# Altium PCB m10motor.PcbDoc
Units mil, origin at the board's own origin, x right, y up, seen from the top; angles counter-clockwise.
Board outline 2000 x 2600 mil, 2 copper layers (Top Layer, Bottom Layer); 22 components, 53 nets, 113 pads, 18 vias.
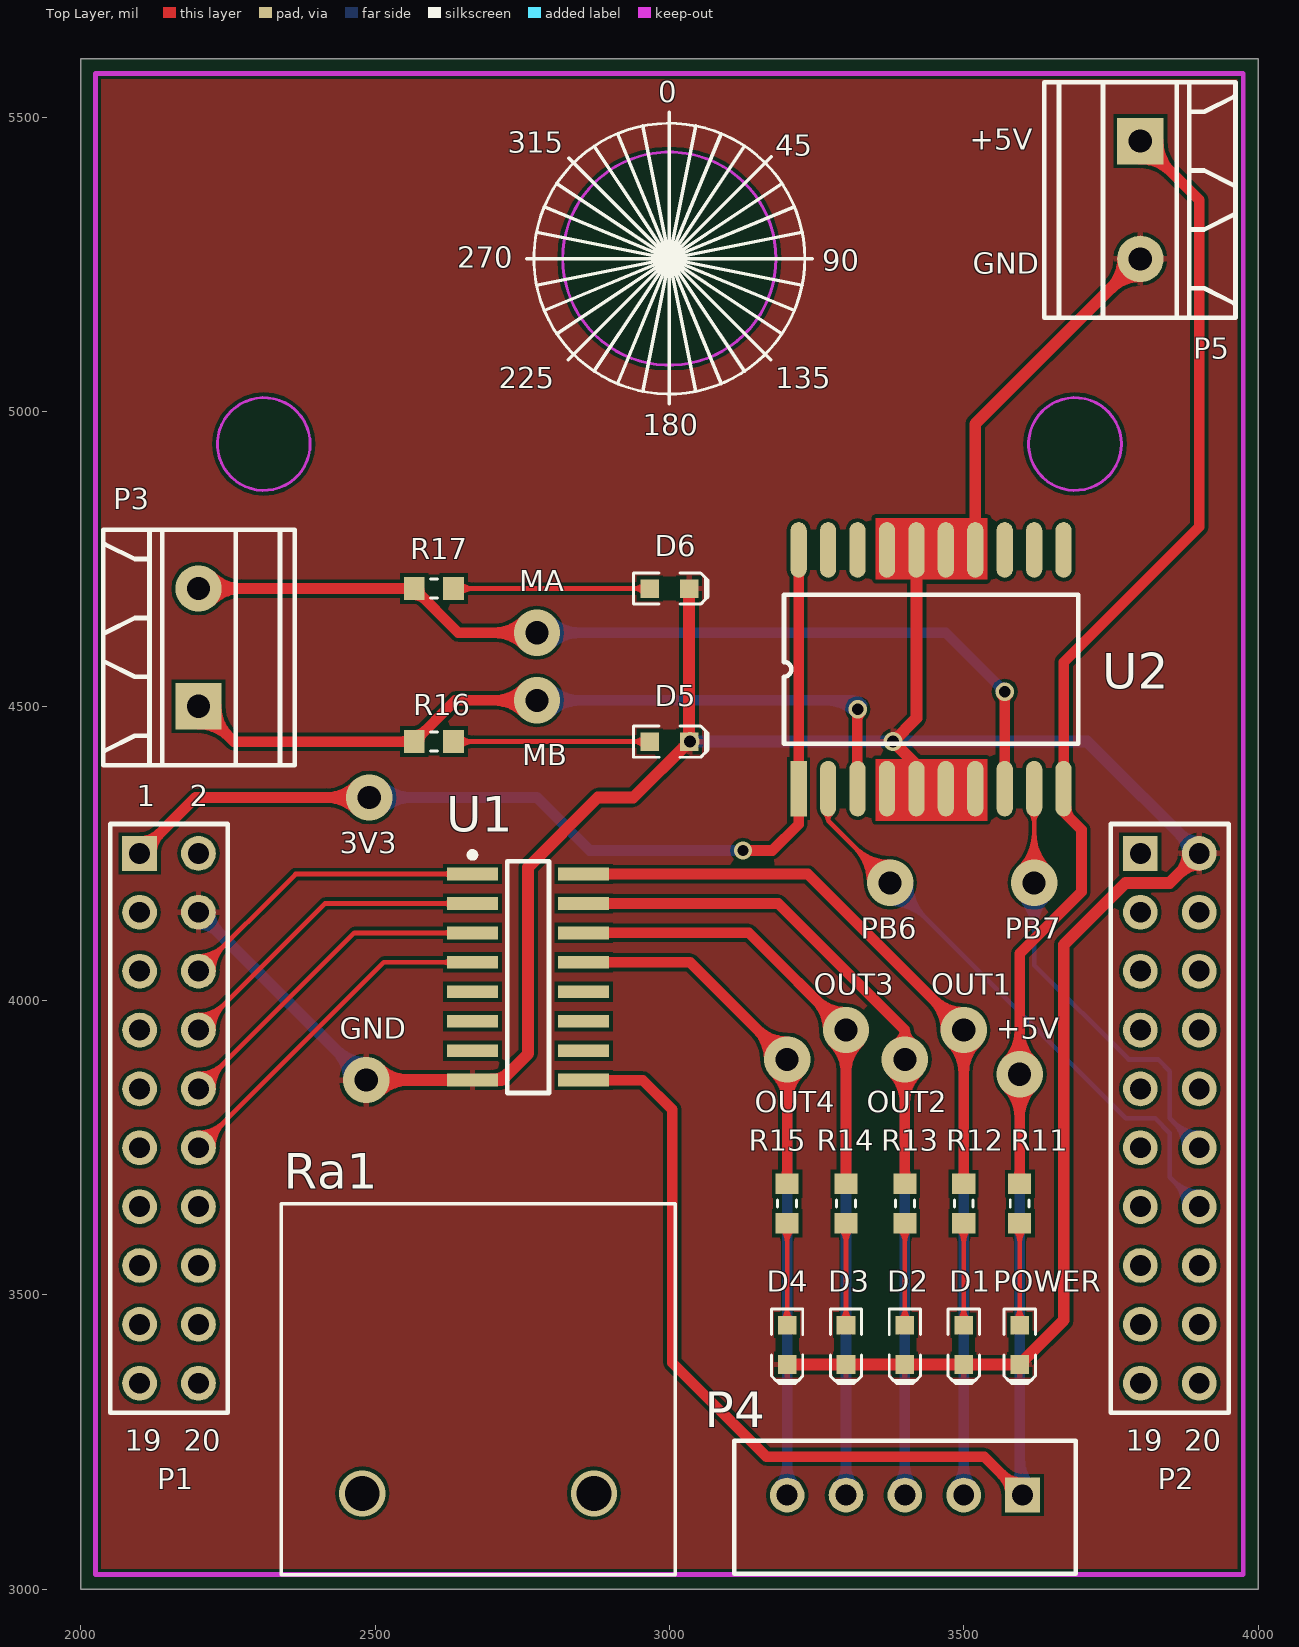
[diagram p0: Top Layer view]
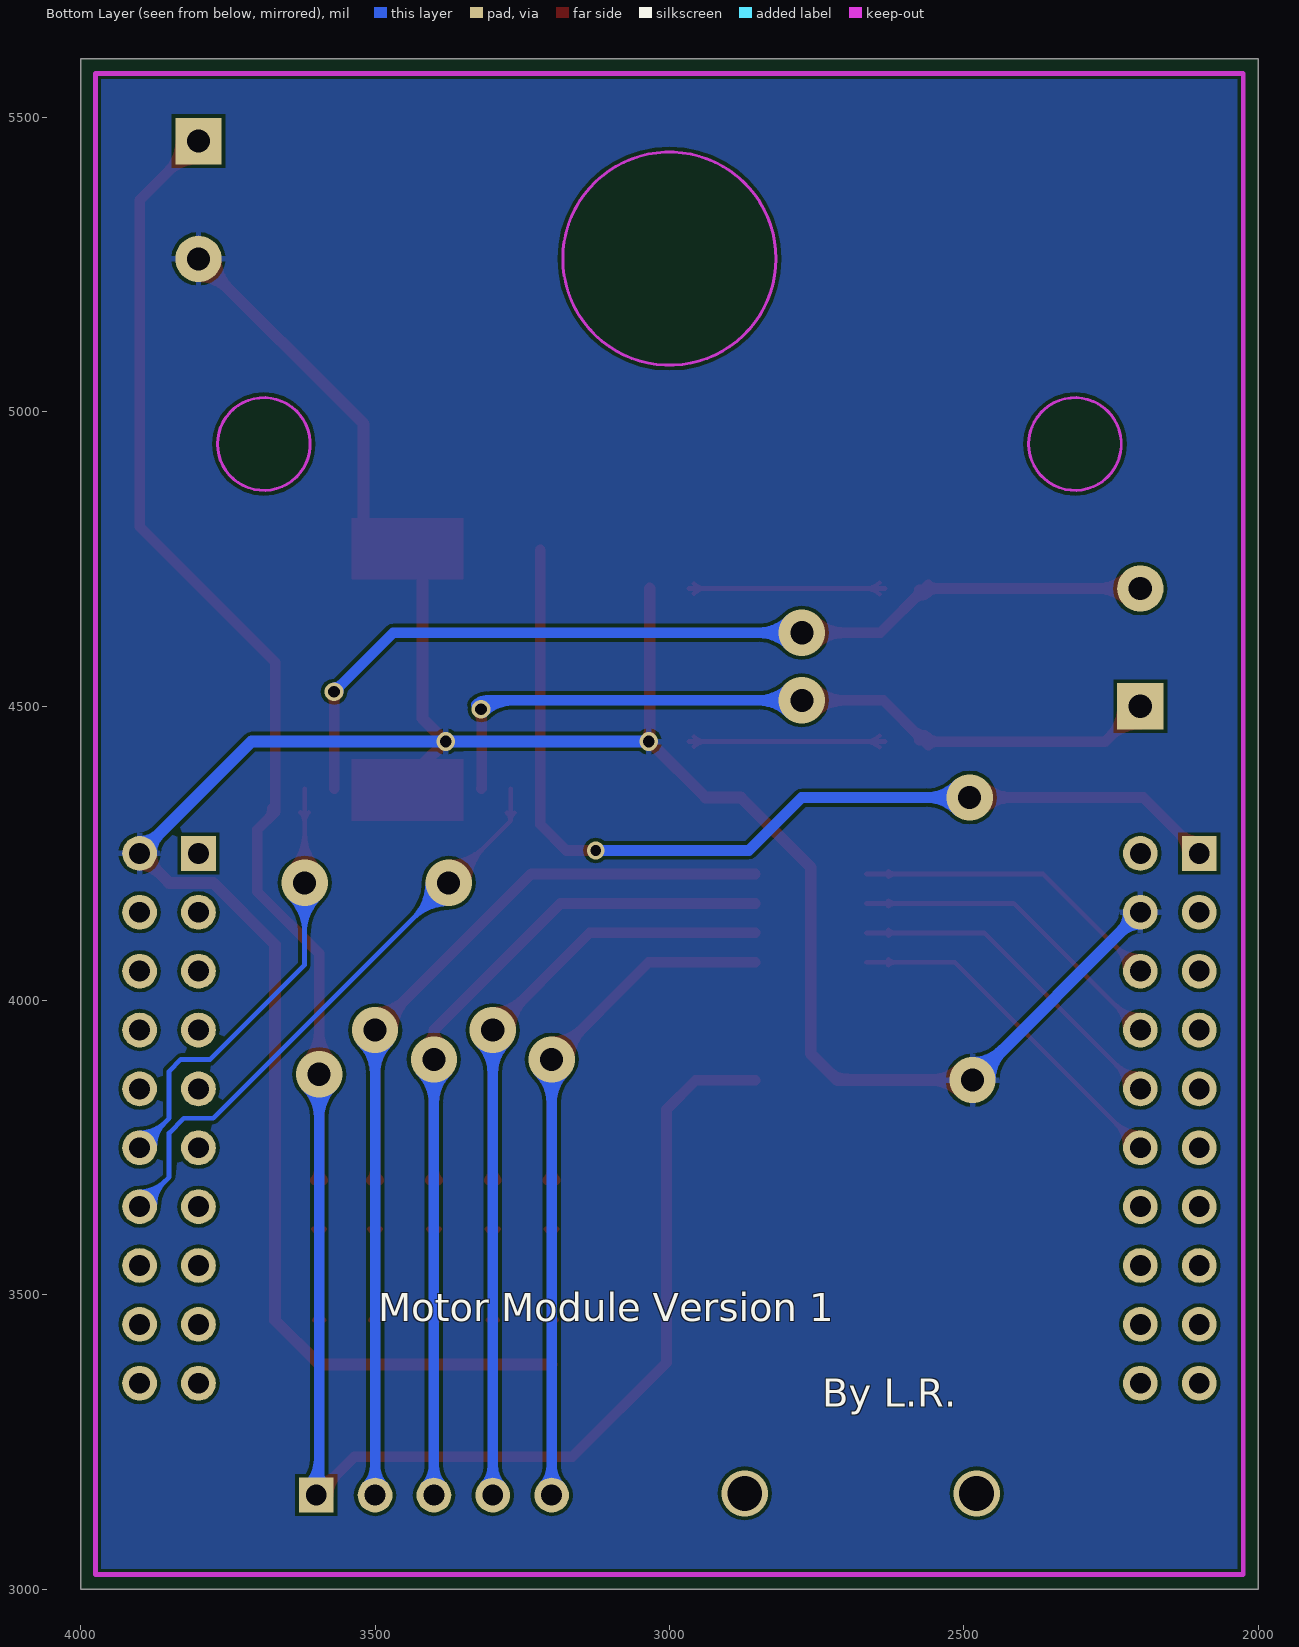
[diagram p1: Bottom Layer view, seen from below]
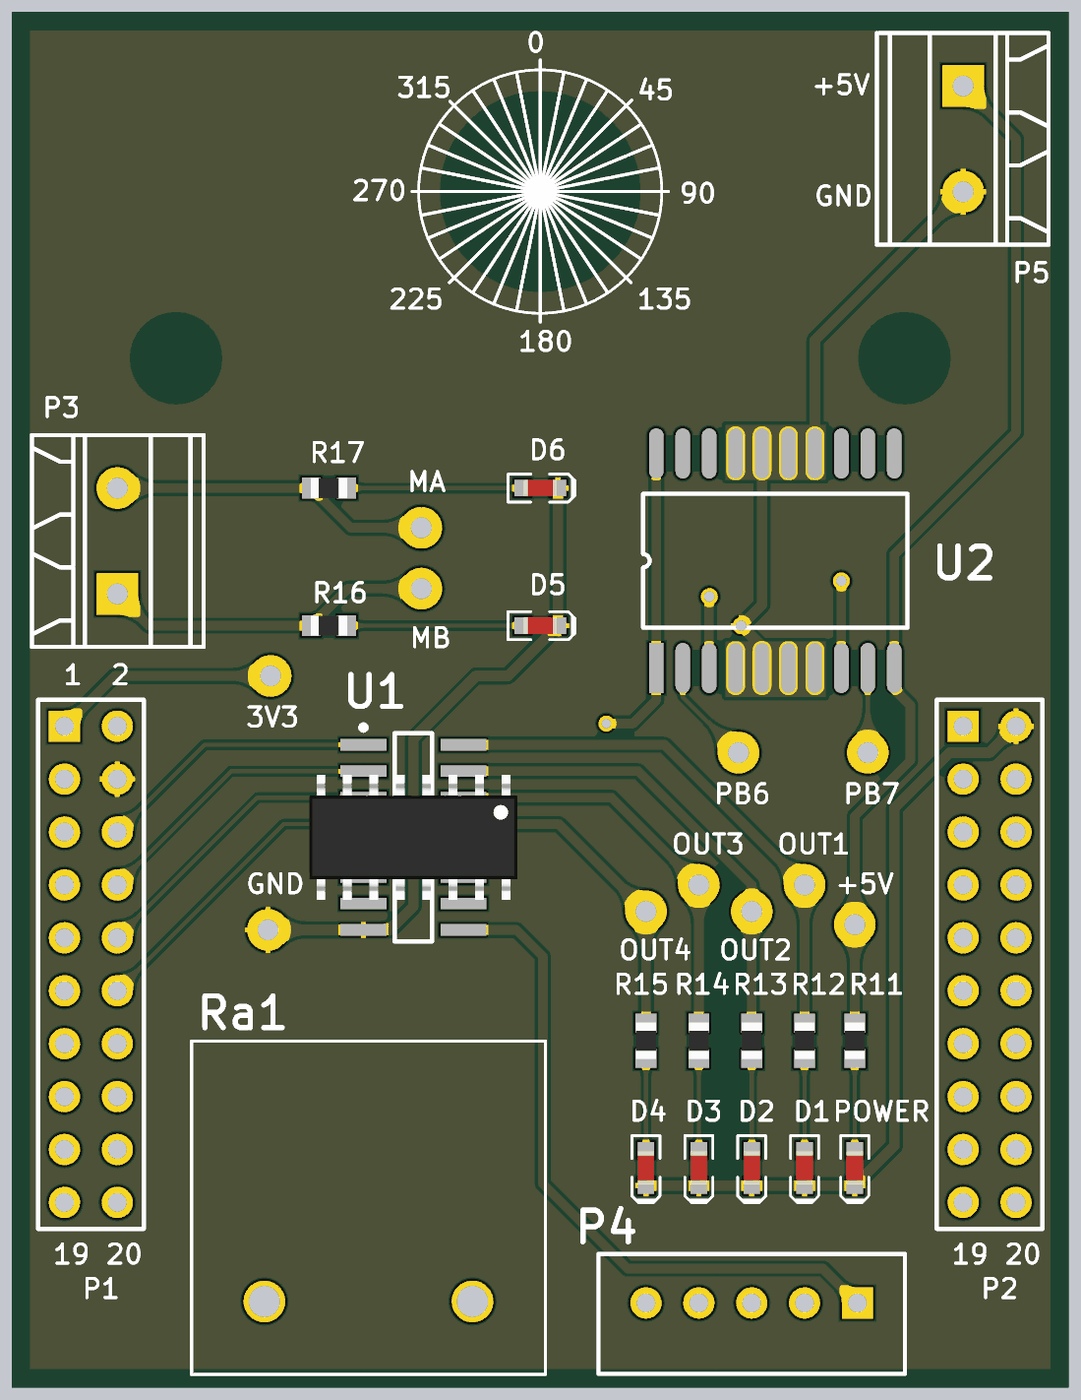
[diagram p2: 3D render of the assembled board from above, using the file's embedded part models]

## Layer stack, top to bottom
Top Layer: signal copper 1.4
Dielectric: dielectric 12.6, FR-4, Dk 4.8
Bottom Layer: signal copper 1.4

## Board outline
2000,3000 4000,3000 4000,5600 2000,5600

## Design rules (kind name [scope] priority, off if disabled: settings)
Clearance [All] p1: gap=6
PolygonConnect [All] p1: connectstyle=Relief reliefconductorwidth=10 reliefentries=4 polygonreliefangle="90 Angle"
RoutingVias VSS [InNet('GND')] p1: holewidth=20 width=32 viastyle="Through Hole" minholewidth=20 minwidth=32 maxholewidth=40 maxwidth=80
RoutingVias 5V [(InNet('MA') OR InNet('MB') OR InNet('O1') OR InNet('O2') OR InNet('O3') OR InNet('O4') OR InNet('VCC') OR InNet('VCC3.3'))] p2: holewidth=18 width=30 viastyle="Through Hole" minholewidth=18 minwidth=30 maxholewidth=40 maxwidth=80
RoutingVias [All] p3: holewidth=12 width=24 viastyle="Through Hole" minholewidth=12 minwidth=24 maxholewidth=40 maxwidth=80
SilkscreenOverComponentPads [All] p1: minsilkscreentomaskgap=10
SolderMaskExpansion [All] p1: expansion=4
Width GND [InNet('GND')] p1: maxlimit=20 minlimit=20 preferedwidth=20 minimp=50.000000 maximp=50.000000 favimp=50.000000
Width VCC [(InNet('MA') OR InNet('MB') OR InNet('O1') OR InNet('O2') OR InNet('O3') OR InNet('O4') OR InNet('VCC') OR InNet('VCC3.3'))] p2: maxlimit=18 minlimit=18 preferedwidth=18 minimp=50.000000 maximp=50.000000 favimp=50.000000
Width [All] p3: maxlimit=8 minlimit=8 preferedwidth=8
27 further rules are at their usual default settings.

## Components (designator, comment, footprint, x,y, rotation, side; value= is the part's Value field where it differs from the comment)
D1 "LED2" LED_0603_RED 3500,3415.32 r270 top
D2 "LED2" LED_0603_RED 3400,3415.32 r270 top
D3 "LED2" LED_0603_RED 3300,3415.32 r270 top
D4 "LED2" LED_0603_RED 3200,3415.32 r270 top
D5 "LED2" LED_0603_RED 3000,4440 r0 top
D6 "LED2" LED_0603_RED 3000,4700 r0 top
P1 "Header 10X2" HDR2X10 2100,4250 r270 top
P2 "Header 10X2" HDR2X10 3800,4250 r270 top
P3 "Header 2" MKDSN_2RMI 2200,4500 r90 top
P4 "Header5" XHP5 3600,3160 r180 top
P5 "Header2" MKDSN_2RMI 3800,5460 r270 top
POWER "LED2" LED_0603_RED 3595,3415.32 r270 top
R11 "Res Semi" RES_0603 3595,3655.32 r270 top
R12 "Res Semi" RES_0603 3500,3655.32 r270 top
R13 "Res Semi" RES_0603 3400,3655.32 r270 top
R14 "Res Semi" RES_0603 3300,3655.32 r270 top
R15 "Res Semi" RES_0603 3200,3655.32 r270 top
R16 "Res Semi" RES_0603 2600,4440 r0 top
R17 "Res Semi" RES_0603 2600,4700 r0 top
Ra1 "Radiation" Radiation 2360,3025 r0 top
U1 "ULN2003" ULN2003A 2760,4040 r0 top
U2 "L293DD" SOP20 3220,4360 r90 top

## Footprints (in the part's own frame and the unit in brackets; to place one, negate y for a bottom-side part, rotate by r counter-clockwise, add the part's x,y. Pads: shape width x height; smd on the part's side, far side on the other; paste and mask are expansions set on the pad)
HDR2X10 [mm] "Connector; Header; 10x2 Position"
  rect 1.5x1.5 hole 0.9: 1(0,0)
  round 1.5 hole 0.9: 2(0,2.54) 3(2.54,0) 4(2.54,2.54) 5(5.08,0) 6(5.08,2.54) 7(7.62,0) 8(7.62,2.54) 9(10.16,0) 10(10.16,2.54) 11(12.7,0) 12(12.7,2.54) 13(15.24,0) 14(15.24,2.54) 15(17.78,0) 16(17.78,2.54) 17(20.32,0) 18(20.32,2.54) 19(22.86,0) 20(22.86,2.54)
  silkscreen extent -1.27,-1.27 24.13,3.81
LED_0603_RED [mm]
  rect 0.8x0.8 smd: 1(-0.85,0) 2(0.85,0)
  Top Layer pour cut-out: -0.5,0.5 0.5,0.5 0.5,-0.5 -0.5,-0.5
  silkscreen extent -1.55,-0.68 1.68,0.67, body extent -0.8,-0.4 0.8,0.4, height 0.75
MKDSN_2RMI [mm]
  rect 2x2 hole 1: 1(0,0)
  round 2 hole 1: 2(5.08,0)
  silkscreen extent -2.54,-4.15 7.62,4.11
Radiation [mil]
  silkscreen extent -20,0 650,630
RES_0603 [mm]
  rect 0.9x1 smd: 1(-0.85,0) 2(0.85,0)
  Top Layer pour cut-out: -0.4,0.6 0.4,0.6 0.4,-0.6 -0.4,-0.6
  silkscreen extent -0.15,-0.41 0.15,0.41, body extent -0.87,-0.47 0.88,0.48, height 0.54
SOP20 [mm]
  rect 2.4x0.7 smd: 1(0,0.01)
  oval 2.4x0.7 smd: 2(0,-1.26) 3(0,-2.53) 4(0,-3.8) 5(0,-5.07) 6(0,-6.34) 7(0,-7.61) 8(0,-8.88) 9(0,-10.15) 10(0,-11.42) 11(10.3,-11.42) 12(10.3,-10.15) 13(10.3,-8.88) 14(10.3,-7.61) 15(10.3,-6.34) 16(10.3,-5.07) 17(10.3,-3.8) 18(10.3,-2.53) 19(10.3,-1.26) 20(10.3,0.01)
  silkscreen extent 1.94,-12.06 8.37,0.64
ULN2003A [mm] "SOIC, 16-Leads, Body 9.90x3.90mm, Pitch 1.27mm, IPC Medium Density"
  rect 2.2x0.55 smd: 1(-2.4,4.445) 2(-2.4,3.175) 3(-2.4,1.905) 4(-2.4,0.635) 5(-2.4,-0.635) 6(-2.4,-1.905) 7(-2.4,-3.175) 8(-2.4,-4.445) 9(2.4,-4.445) 10(2.4,-3.175) 11(2.4,-1.905) 12(2.4,-0.635) 13(2.4,0.635) 14(2.4,1.905) 15(2.4,3.175) 16(2.4,4.445)
  silkscreen extent -2.52,-5 0.9,5.39, body extent -3,-5 3,5, height 1.75
XHP5 [mm]
  rect 1.5x1.5 hole 0.9: 1(0,0)
  round 1.5 hole 0.9: 2(2.54,0) 3(5.08,0) 4(7.62,0) 5(10.16,0)
  silkscreen extent -2.29,-2.35 12.45,3.4

## Part data
D1 D2 D3 D4 D5 D6 POWER: "Typical RED, GREEN, YELLOW, AMBER GaAs LED"
P1 P2: "Header, 10-Pin, Dual row"
P3: "Header, 2-Pin"
R11 R12 R13 R14 R15 R16 R17: "Semiconductor Resistor"
U2: "L293DD MOTOR"

## Via types
v1: diameter 78.74, hole 39.37, Top Layer to Bottom Layer, 11 vias
v2: diameter 32, hole 20, Top Layer to Bottom Layer, 4 vias
v3: diameter 78.74, hole 59.06, Top Layer to Bottom Layer, 2 vias
v4: diameter 30, hole 18, Top Layer to Bottom Layer, 1 vias

## Nets (pads, with @x,y where several pads share a name; then routed paths per layer and width w, separated by ;. In a path a pad name is that pad's centre, name@x,y a point inside that pad or via, vN(x,y) a via of type N, cw(c..) or ccw(c..) an arc to the next point about the centre after c; other vN are vias at no path point)
GND: D1.2 D2.2 D3.2 D4.2 D5.2 D6.2 P1.4 P2.2 P5.2 POWER.2 U1.8 U2.4 U2.5 U2.6 U2.7 U2.14 U2.15 U2.16 U2.17 | length 5701.4
  Top Layer w20: v1(2485,3865) U1.8 2715,3865 2760,3910 2760,4226.53 2878.47,4345 2938.47,4345 D5.2 D6.2 ; v1@2505.77,3844.23 cw(c2555.91,3794.09) 2555.91,3865 cw(c2555.91,3935.91) v1@2505.77,3885.77 ; U1.8@2697.99,3865.83 ccw(c2697.99,3908.88) 2728.44,3878.44 ; D5.2@3022.14,4428.67 cw(c3035,4415.8) D5.2@3035,4434 ; 3033.46,4458.19 ccw(c3053.19,4458.19) D5.2@3039.24,4444.24 ; D4.2 D3.2 D2.2 D1.2 POWER.2 3670,3456.85 3670,4095 3775,4200 3850,4200 P2.2 ; 3408.26,4411.74 cw(c3389.98,4393.46) U2.5@3415.83,4393.46 ; U2.5 3419.61,4400.39 v2(3380,4440) 3419.61,4479.61 U2.16 ; U2.14 3519.61,4979.61 P5.2 ; P5.2@3770.63,5260 cw(c3699.72,5260) 3749.86,5209.86 cw(c3800,5159.72) P5.2@3800,5230.63 ; P2.2@3880.47,4250 cw(c3833.33,4250) 3866.66,4216.66 cw(c3900,4183.33) P2.2@3900,4230.47
  Bottom Layer w20: P1.4@2200,4130.47 cw(c2200,4083.33) 2233.34,4116.66 cw(c2266.67,4150) P1.4@2219.53,4150 ; P1.4 v1(2485,3865) ; v1@2455.63,3865 ccw(c2384.72,3865) 2434.86,3915.14 ccw(c2485,3965.28) v1@2485,3894.37 ; v2(3035,4440) 3350,4440 v2(3380,4440) 3710,4440 P2.2 ; P2.2@3880.47,4250 ccw(c3833.33,4250) 3866.66,4283.34 ccw(c3900,4316.67) P2.2@3900,4269.53
I01: P1.6 U1.1 | length 723
  Top Layer w8: P1.6 2365,4215 U1.1 ; P1.6@2200,4067.53 ccw(c2200,4109.84) 2229.92,4079.92 ccw(c2259.84,4050) P1.6@2217.53,4050 ; P1.6@2200,4075.53 ccw(c2200,4137.16) 2243.58,4093.58 ccw(c2287.16,4050) P1.6@2225.53,4050 ; U1.1@2628.2,4210.17 ccw(c2616.55,4198.52) 2616.55,4215 ccw(c2616.55,4231.48) U1.1@2628.2,4219.83
I02: P1.8 U1.2 | length 743.7
  Top Layer w8: P1.8 2415,4165 U1.2 ; P1.8@2200,3967.53 ccw(c2200,4009.84) 2229.92,3979.92 ccw(c2259.84,3950) P1.8@2217.53,3950 ; P1.8@2200,3975.53 ccw(c2200,4037.16) 2243.58,3993.58 ccw(c2287.16,3950) P1.8@2225.53,3950 ; U1.2@2628.2,4160.17 ccw(c2616.55,4148.52) 2616.55,4165 ccw(c2616.55,4181.48) U1.2@2628.2,4169.83
I03: P1.10 U1.3 | length 764.4
  Top Layer w8: P1.10 2465,4115 U1.3 ; P1.10@2200,3867.53 ccw(c2200,3909.84) 2229.92,3879.92 ccw(c2259.84,3850) P1.10@2217.53,3850 ; P1.10@2200,3875.53 ccw(c2200,3937.16) 2243.58,3893.58 ccw(c2287.16,3850) P1.10@2225.53,3850 ; U1.3@2628.2,4110.17 ccw(c2616.55,4098.52) 2616.55,4115 ccw(c2616.55,4131.48) U1.3@2628.2,4119.83
I04: P1.12 U1.4 | length 785.2
  Top Layer w8: P1.12 2515,4065 U1.4 ; P1.12@2200,3767.53 ccw(c2200,3809.84) 2229.92,3779.92 ccw(c2259.84,3750) P1.12@2217.53,3750 ; P1.12@2200,3775.53 ccw(c2200,3837.16) 2243.58,3793.58 ccw(c2287.16,3750) P1.12@2225.53,3750 ; U1.4@2628.2,4060.17 ccw(c2616.55,4048.52) 2616.55,4065 ccw(c2616.55,4081.48) U1.4@2628.2,4069.83
MA: P3.1 R16.1 U2.3 | length 1816.2
  Top Layer w18: P3.1@2200,4469.63 cw(c2200,4396.31) 2251.84,4448.15 cw(c2303.69,4500) P3.1@2230.37,4500 ; P3.1 2260,4440 R16.1 2636.53,4510 v1(2775,4510) ; R16.1@2560.37,4433.84 ccw(c2545.49,4418.96) 2545.49,4440 ccw(c2545.49,4461.04) R16.1@2560.37,4446.16 ; R16.1@2566.53,4450.68 ccw(c2566.53,4476.48) 2584.77,4458.24 ; R16.1@2575.25,4441.97 cw(c2591.54,4441.97) R16.1@2580.02,4453.49 ; v1@2753.53,4488.53 ccw(c2701.68,4436.68) 2701.68,4510 ccw(c2701.68,4583.32) v1@2753.53,4531.47 ; 3319,4475.69 cw(c3339.31,4475.69) v2@3324.95,4490.05 ; U2.3 3319,4360.61 3319,4494 v2(3320,4495)
  Bottom Layer w18: v1(2775,4510) 3305,4510 v2(3320,4495) ; v1@2796.47,4488.53 cw(c2848.32,4436.68) 2848.32,4510 cw(c2848.32,4583.32) v1@2796.47,4531.47 ; 3266.89,4510 cw(c3266.89,4441.89) v2@3315.05,4490.05 ; 3310.34,4510 cw(c3310.34,4485.34) v2@3327.78,4502.78
MB: P3.2 R17.1 U2.8 | length 2071.6
  Top Layer w18: P3.2 R17.1 2641.53,4625 v1(2775,4625) ; P3.2@2221.47,4678.53 cw(c2273.32,4626.68) 2273.32,4700 cw(c2273.32,4773.32) P3.2@2221.47,4721.47 ; R17.1@2560.37,4693.84 ccw(c2545.49,4678.96) 2545.49,4700 ccw(c2545.49,4721.04) R17.1@2560.37,4706.16 ; R17.1@2566.53,4689.32 cw(c2566.53,4663.52) 2584.77,4681.76 ; R17.1@2575.25,4698.03 ccw(c2591.54,4698.03) R17.1@2580.02,4686.51 ; v1@2753.53,4603.53 ccw(c2701.68,4551.68) 2701.68,4625 ccw(c2701.68,4698.32) v1@2753.53,4646.47 ; v2@3564.66,4519.66 cw(c3552.71,4507.71) 3569.61,4507.71 cw(c3586.51,4507.71) v2@3574.56,4519.66 ; U2.8 v2(3569.61,4524.61)
  Bottom Layer w18: v1(2775,4625) 3469.22,4625 v2(3569.61,4524.61) ; v1@2796.47,4603.53 cw(c2848.32,4551.68) 2848.32,4625 cw(c2848.32,4698.32) v1@2796.47,4646.47 ; v2@3562.61,4524.61 ccw(c3545.71,4524.61) 3557.66,4536.56 ccw(c3569.61,4548.51) v2@3569.61,4531.61
NetD1_1: D1.1 R12.2 | length 269.6
  Top Layer w8: R12.2@3490.3,3612.15 cw(c3466.89,3588.74) 3500,3588.74 cw(c3533.11,3588.74) R12.2@3509.7,3612.15 ; D1.1@3491.69,3457.09 ccw(c3471.63,3477.15) 3500,3477.15 ccw(c3528.36,3477.14) D1.1@3508.31,3457.09 ; D1.1 R12.2
NetD2_1: D2.1 R13.2 | length 269.6
  Top Layer w8: R13.2@3390.3,3612.15 cw(c3366.89,3588.74) 3400,3588.74 cw(c3433.11,3588.74) R13.2@3409.7,3612.15 ; D2.1@3391.69,3457.09 ccw(c3371.63,3477.15) 3400,3477.15 ccw(c3428.36,3477.14) D2.1@3408.31,3457.09 ; D2.1 R13.2
NetD3_1: D3.1 R14.2 | length 269.6
  Top Layer w8: R14.2@3290.3,3612.15 cw(c3266.89,3588.74) 3300,3588.74 cw(c3333.11,3588.74) R14.2@3309.7,3612.15 ; D3.1@3291.69,3457.09 ccw(c3271.63,3477.15) 3300,3477.15 ccw(c3328.36,3477.14) D3.1@3308.31,3457.09 ; D3.1 R14.2
NetD4_1: D4.1 R15.2 | length 269.6
  Top Layer w8: R15.2@3190.3,3612.15 cw(c3166.89,3588.74) 3200,3588.74 cw(c3233.11,3588.74) R15.2@3209.7,3612.15 ; D4.1@3191.69,3457.09 ccw(c3171.63,3477.15) 3200,3477.15 ccw(c3228.36,3477.14) D4.1@3208.31,3457.09 ; D4.1 R15.2
NetD5_1: D5.1 R16.2 | length 429.6
  Top Layer w8: R16.2 2746.54,4440 D5.1 ; R16.2@2643.16,4430.3 cw(c2666.58,4406.89) 2666.58,4440 cw(c2666.58,4473.11) R16.2@2643.16,4449.7 ; D5.1@2958.23,4431.69 ccw(c2938.17,4411.64) 2938.17,4440 ccw(c2938.17,4468.36) D5.1@2958.23,4448.31
NetD6_1: D6.1 R17.2 | length 429.6
  Top Layer w8: R17.2 D6.1 ; R17.2@2643.16,4690.3 cw(c2666.58,4666.89) 2666.58,4700 cw(c2666.58,4733.11) R17.2@2643.16,4709.7 ; 2938.17,4700 cw(c2938.17,4671.63) D6.1@2958.23,4691.69 ; 2938.18,4700 ccw(c2938.18,4728.36) D6.1@2958.23,4708.31
NetPOWER_1: POWER.1 R11.2 | length 269.6
  Top Layer w8: R11.2@3585.3,3612.15 cw(c3561.89,3588.74) 3595,3588.74 cw(c3628.11,3588.74) R11.2@3604.7,3612.15 ; POWER.1@3586.69,3457.09 ccw(c3566.63,3477.15) 3595,3477.15 ccw(c3623.36,3477.14) POWER.1@3603.31,3457.09 ; POWER.1 R11.2
O1: P4.2 R12.1 U1.16 | length 2267.9
  Top Layer w18: U1.16 3235,4215 v1(3500,3950) R12.1 ; v1@3469.63,3950 ccw(c3396.31,3950) 3448.15,4001.84 ccw(c3500,4053.69) v1@3500,3980.37 ; v1@3478.53,3928.53 cw(c3426.68,3876.68) 3500,3876.68 cw(c3573.32,3876.68) v1@3521.47,3928.53 ; R12.1@3493.84,3694.94 ccw(c3478.96,3709.82) 3500,3709.82 ccw(c3521.04,3709.82) R12.1@3506.16,3694.94
  Bottom Layer w18: v1@3478.53,3928.53 cw(c3426.66,3876.66) 3500.01,3876.66 ; P4.2@3485.48,3174.52 ccw(c3450.42,3209.58) 3500.01,3209.58 ; P4.2 v1@3500.01,3955 ; 3500.01,3209.53 ccw(c3549.53,3209.53) P4.2@3514.52,3174.52 ; 3500.01,3876.7 cw(c3573.3,3876.7) v1@3521.47,3928.53
O2: P4.3 R13.1 U1.15 | length 2033.7
  Top Layer w18: U1.15 3185,4165 3400,3950 ; v1@3378.53,3878.53 cw(c3326.68,3826.68) 3400,3826.68 cw(c3473.32,3826.68) v1@3421.47,3878.53 ; v1@3386,3926.95 ccw(c3374.03,3950) 3400,3950 ; R13.1@3393.84,3694.94 ccw(c3378.96,3709.82) 3400,3709.82 ccw(c3421.04,3709.82) R13.1@3406.16,3694.94 ; R13.1 3400,3950 ; v1@3414,3926.95 cw(c3425.97,3950) 3400,3950
  Bottom Layer w18: v1@3378.53,3878.53 cw(c3326.66,3826.66) 3400.01,3826.66 ; P4.3@3385.48,3174.52 ccw(c3350.42,3209.58) 3400.01,3209.58 ; P4.3 v1(3400,3900) ; 3400.01,3209.53 ccw(c3449.53,3209.53) P4.3@3414.52,3174.52 ; 3400.01,3826.7 cw(c3473.3,3826.7) v1@3421.47,3878.53
O3: P4.4 R14.1 U1.14 | length 2021.5
  Top Layer w18: U1.14 3135,4115 v1(3300.01,3949.99) R14.1 ; v1@3269.64,3949.99 ccw(c3196.32,3949.99) 3248.16,4001.83 ccw(c3300.01,4053.68) v1@3300.01,3980.36 ; v1@3278.54,3928.52 cw(c3226.71,3876.69) 3300,3876.69 ; R14.1@3293.84,3694.94 ccw(c3278.96,3709.82) 3300,3709.82 ccw(c3321.04,3709.82) R14.1@3306.16,3694.94 ; 3300,3876.65 cw(c3373.35,3876.65) v1@3321.48,3928.52
  Bottom Layer w18: v1@3278.54,3928.52 cw(c3226.69,3876.67) 3300.01,3876.67 cw(c3373.33,3876.67) v1@3321.48,3928.52 ; P4.4@3285.48,3174.52 ccw(c3250.42,3209.58) 3300.01,3209.58 ; P4.4 v1(3300.01,3949.99) ; 3300.01,3209.53 ccw(c3349.53,3209.53) P4.4@3314.52,3174.52
O4: P4.5 R15.1 U1.13 | length 1821.5
  Top Layer w18: U1.13 3035,4065 v1(3200.01,3899.99) R15.1 ; v1@3169.64,3899.99 ccw(c3096.32,3899.99) 3148.16,3951.83 ccw(c3200.01,4003.68) v1@3200.01,3930.36 ; v1@3178.54,3878.52 cw(c3126.71,3826.69) 3200,3826.69 ; R15.1@3193.84,3694.94 ccw(c3178.96,3709.82) 3200,3709.82 ccw(c3221.04,3709.82) R15.1@3206.16,3694.94 ; 3200,3826.65 cw(c3273.35,3826.65) v1@3221.48,3878.52
  Bottom Layer w18: v1@3178.54,3878.52 cw(c3126.69,3826.67) 3200.01,3826.67 cw(c3273.33,3826.67) v1@3221.48,3878.52 ; P4.5@3185.48,3174.52 ccw(c3150.42,3209.58) 3200.01,3209.58 ; P4.5 v1(3200.01,3899.99) ; 3200.01,3209.53 ccw(c3249.53,3209.53) P4.5@3214.52,3174.52
PA2: P2.20
PA3: P2.18
PA4: P2.16
PA5: P1.15
PA6: P1.17
PA7: P1.19
PB0: P1.5
PB1: P1.7
PB2: P2.4
PB3: P2.5
PB4: P1.13
PB5: P1.3
PB6: P2.14 U2.2 | length 1817.6
  Top Layer w8: U2.2@3263.28,4319.08 cw(c3251.64,4305.39) 3269.61,4305.39 ; U2.2 3269.61,4305.39 ; U2.2@3275.94,4319.08 ccw(c3287.57,4305.39) 3269.61,4305.39 ; v1@3339.63,4200 ccw(c3254.24,4200) 3314.62,4260.38 ccw(c3375,4320.76) v1@3375,4235.37 ; v1@3347.63,4200 ccw(c3281.55,4200) 3328.28,4246.72 ccw(c3375,4293.45) v1@3375,4227.37 ; v1@3355.63,4200 ccw(c3308.87,4200) 3341.93,4233.07 ccw(c3375,4266.13) v1@3375,4219.37 ; v1(3375,4200) 3269.61,4305.39
  Bottom Layer w8: v1@3375,4164.63 cw(c3375,4079.24) 3435.38,4139.62 cw(c3495.76,4200) v1@3410.37,4200 ; v1@3375,4172.63 cw(c3375,4106.55) 3421.72,4153.28 cw(c3468.45,4200) v1@3402.37,4200 ; v1@3375,4180.63 cw(c3375,4133.87) 3408.07,4166.93 cw(c3441.13,4200) v1@3394.37,4200 ; v1(3375,4200) 3775,3800 3825,3800 3850,3775 3850,3700 P2.14 ; P2.14@3874.47,3650 ccw(c3812.84,3650) 3856.42,3693.58 ccw(c3900,3737.16) P2.14@3900,3675.53 ; P2.14@3882.47,3650 ccw(c3840.16,3650) 3870.08,3679.92 ccw(c3900,3709.84) P2.14@3900,3667.53
PB7: P2.12 U2.9 | length 1591
  Top Layer w8: v1@3594.6,4225.01 ccw(c3534.22,4285.39) 3619.61,4285.39 ccw(c3705,4285.39) v1@3644.62,4225.01 ; v1@3600.25,4219.35 ccw(c3553.53,4266.08) 3619.61,4266.08 ccw(c3685.69,4266.08) v1@3638.96,4219.35 ; v1@3605.91,4213.7 ccw(c3572.84,4246.76) 3619.61,4246.76 ccw(c3666.37,4246.76) v1@3633.3,4213.7 ; U2.9@3612.69,4319.62 cw(c3596,4302.93) 3619.61,4302.93 cw(c3643.22,4302.93) U2.9@3626.52,4319.62 ; v1(3619.61,4200) U2.9
  Bottom Layer w8: v1@3594.6,4174.99 cw(c3533.27,4113.66) 3620,4113.66 ; v1@3600.25,4180.65 cw(c3552.58,4132.98) 3620,4132.98 ; v1@3605.91,4186.3 cw(c3571.9,4152.29) 3620,4152.29 ; v1(3619.61,4200) 3635,4184.61 3620,4169.61 3620,4060 3780,3900 3830,3900 3850,3880 3850,3800 P2.12 ; 3620,4115.56 cw(c3704.05,4115.56) v1@3644.62,4174.99 ; 3620,4134.87 cw(c3684.74,4134.87) v1@3638.96,4180.65 ; 3620,4154.18 cw(c3665.43,4154.18) v1@3633.3,4186.3 ; P2.12@3874.47,3750 ccw(c3812.84,3750) 3856.42,3793.58 ccw(c3900,3837.16) P2.12@3900,3775.53 ; P2.12@3882.47,3750 ccw(c3840.16,3750) 3870.08,3779.92 ccw(c3900,3809.84) P2.12@3900,3767.53
PC4: P2.7
PC5: P2.9
PC6: P2.11
PC7: P2.13
PD6: P2.15
PD7: P2.17
PE0: P2.6
PE1: P1.14
PE2: P1.16
PE3: P1.18
PE4: P1.9
PE5: P1.11
PF0: P2.8
PF1: P1.20
PF2: P2.1
PF3: P2.3
PF4: P2.19
RST: P2.10
VBUS: P1.2
VCC: P4.1 P5.1 R11.1 U1.9 U2.10 | length 4640.8
  Top Layer w18: U1.9 2955,3865 3005,3815 3005,3385 3165,3225 3535,3225 P4.1 ; v1@3573.53,3853.53 cw(c3521.68,3801.68) 3595,3801.68 cw(c3668.32,3801.68) v1@3616.47,3853.53 ; v1@3573.53,3896.47 ccw(c3521.68,3948.32) 3595,3948.32 ccw(c3668.32,3948.32) v1@3616.47,3896.47 ; P4.1@3579.47,3160 ccw(c3529.91,3160) 3564.96,3195.04 ccw(c3600,3230.09) P4.1@3600,3180.53 ; R11.1@3588.84,3694.94 ccw(c3573.96,3709.82) 3595,3709.82 ccw(c3616.04,3709.82) R11.1@3601.16,3694.94 ; R11.1 v1(3595,3875) 3595,4080 3700,4185 3700,4290 3669.61,4320.39 U2.10 3669.61,4574.61 3900,4805 3900,5360 P5.1 ; U2.10@3674.39,4326.54 ccw(c3700.76,4326.54) 3682.11,4307.89 ; P5.1@3800,5429.63 cw(c3800,5356.31) 3851.84,5408.15 cw(c3903.69,5460) P5.1@3830.37,5460
  Bottom Layer w18: v1@3573.53,3853.53 cw(c3521.68,3801.68) 3595,3801.68 cw(c3668.32,3801.68) v1@3616.47,3853.53 ; P4.1@3585.48,3174.52 ccw(c3562.51,3197.49) 3595,3197.49 ; 3595,3221.63 ccw(c3661.63,3221.63) P4.1@3614.52,3174.52 ; v1(3595,3875) 3595,3165 P4.1
VCC3.3: P1.1 U2.1 U2.20 | length 1988.8
  Top Layer w18: P1.1 2195,4345 v1(2490,4345) ; P1.1@2100,4270.53 ccw(c2100,4320.09) 2135.04,4285.04 ccw(c2170.09,4250) P1.1@2120.53,4250 ; v1@2468.53,4323.53 ccw(c2416.68,4271.68) 2416.68,4345 ccw(c2416.68,4418.32) v1@2468.53,4366.47 ; v4(3125,4255) 3175,4255 3219.61,4299.61 U2.1 U2.20
  Bottom Layer w18: v1(2490,4345) 2775,4345 2865,4255 v4(3125,4255) ; v1@2511.47,4323.53 cw(c2563.32,4271.68) 2563.32,4345 cw(c2563.32,4418.32) v1@2511.47,4366.47
pads on no net: U1.5 U1.6 U1.7 U1.10 U1.11 U1.12 U2.11 U2.12 U2.13 U2.18 U2.19
copper on no net:
  other v3: 2478.11,3162.8 2871.81,3162.8

## Polygon pours and split planes (outlines as drawn)
GND on Bottom Layer "Bottom Layer-No Net" (solid, remove dead copper, pour order 1000): 2000,5600 2000,3000 4000,3000 4000,5600
GND on Top Layer "Bottom Layer-No Net" (solid, remove dead copper, pour order 1001): 4000,5595 4000,3000 2000,3000 2000,5600

## Keep-outs
Keep-Out Layer:
  circle w5: c2310.96,4945.46 r78.74
  circle w5: c2999.94,5260.42 r181.1
  circle w5: c3688.92,4945.46 r78.74
  lines w8: 2025,3025 2025,5575 3975,5575 3975,3025 2025,3025

## Other copper
Top Layer:
  rectangle net GND: 3350,4715 3540,4820
  rectangle net GND: 3350,4305 3540,4410

## Silkscreen, mask and mechanical layers (free items; w line width, h text height)
Top Overlay:
  circle w5: c2999.94,5260.42 r230
  lines w6: 2757.5,5260.42 3242.5,5260.42 ; 2774.36,5215.55 3225.52,5305.29 ; 2774.36,5305.29 3225.52,5215.55 ; 2787.45,5172.4 3212.43,5348.43 ; 2787.45,5348.43 3212.43,5172.4 ; 2808.7,5132.64 3191.18,5388.2 ; 2808.7,5388.2 3191.18,5132.64 ; 2828.01,5088.49 3173.01,5433.49 ; 2829.43,5430.93 3171.93,5088.43 ; 2872.16,5069.18 3127.72,5451.66 ; 2872.16,5451.66 3127.72,5069.18 ; 2911.92,5047.92 3087.96,5472.91 ; 2911.92,5472.91 3087.96,5047.92 ; 2955.07,5034.84 3044.81,5486 ; 2955.07,5486 3044.81,5034.84 ; 2999.94,5014 2999.94,5509
  text "0" at 3012.5,5561.6 h36 r180
  text "+5V" at 3510,5445 h36
  text "315" at 2725,5440 h36
  text "45" at 3180,5435 h36
  text "270" at 2640,5245 h36
  text "90" at 3260,5240 h36
  text "GND" at 3515,5235 h36
  text "225" at 2710,5040 h36
  text "135" at 3180,5040 h36
  text "180" at 2955,4960 h36
  text "MA" at 2745,4695 h36
  text "MB" at 2750,4400 h36
  text "3V3" at 2440,4250 h36
  text "PB6" at 3325,4105 h36
  text "PB7" at 3570,4105 h36
  text "OUT3" at 3245,4010 h36
  text "OUT1" at 3445,4010 h36
  text "GND" at 2440,3935 h36
  text "+5V" at 3555,3935 h36
  text "OUT4" at 3145,3810 h36
  text "OUT2" at 3335,3810 h36
Bottom Overlay:
  text "Motor Module Version 1" at 3495,3455 h48
  text "By L.R." at 2740,3310 h48

## Text inside footprints (layer, text, board x,y; h text height)
P1: Top Overlay "2" at 2185,4330 h36; Top Overlay "1" at 2095,4330 h36; Top Overlay "19" at 2075,3235 h36; Top Overlay "20" at 2175,3235 h36
P2: Top Overlay "19" at 3775,3235 h36; Top Overlay "20" at 3875,3235 h36